# Altium PCB PCB_all_try.PcbDoc (part 1 of 5)
Units mm, origin at the board's own origin, x right, y up, seen from the top; angles counter-clockwise.
Board outline 345 x 240 mm, 2 copper layers (Top Layer, Bottom Layer); 484 components, 419 nets, 1569 pads, 699 vias.
Unrouted connection lines stored in the file: 63.
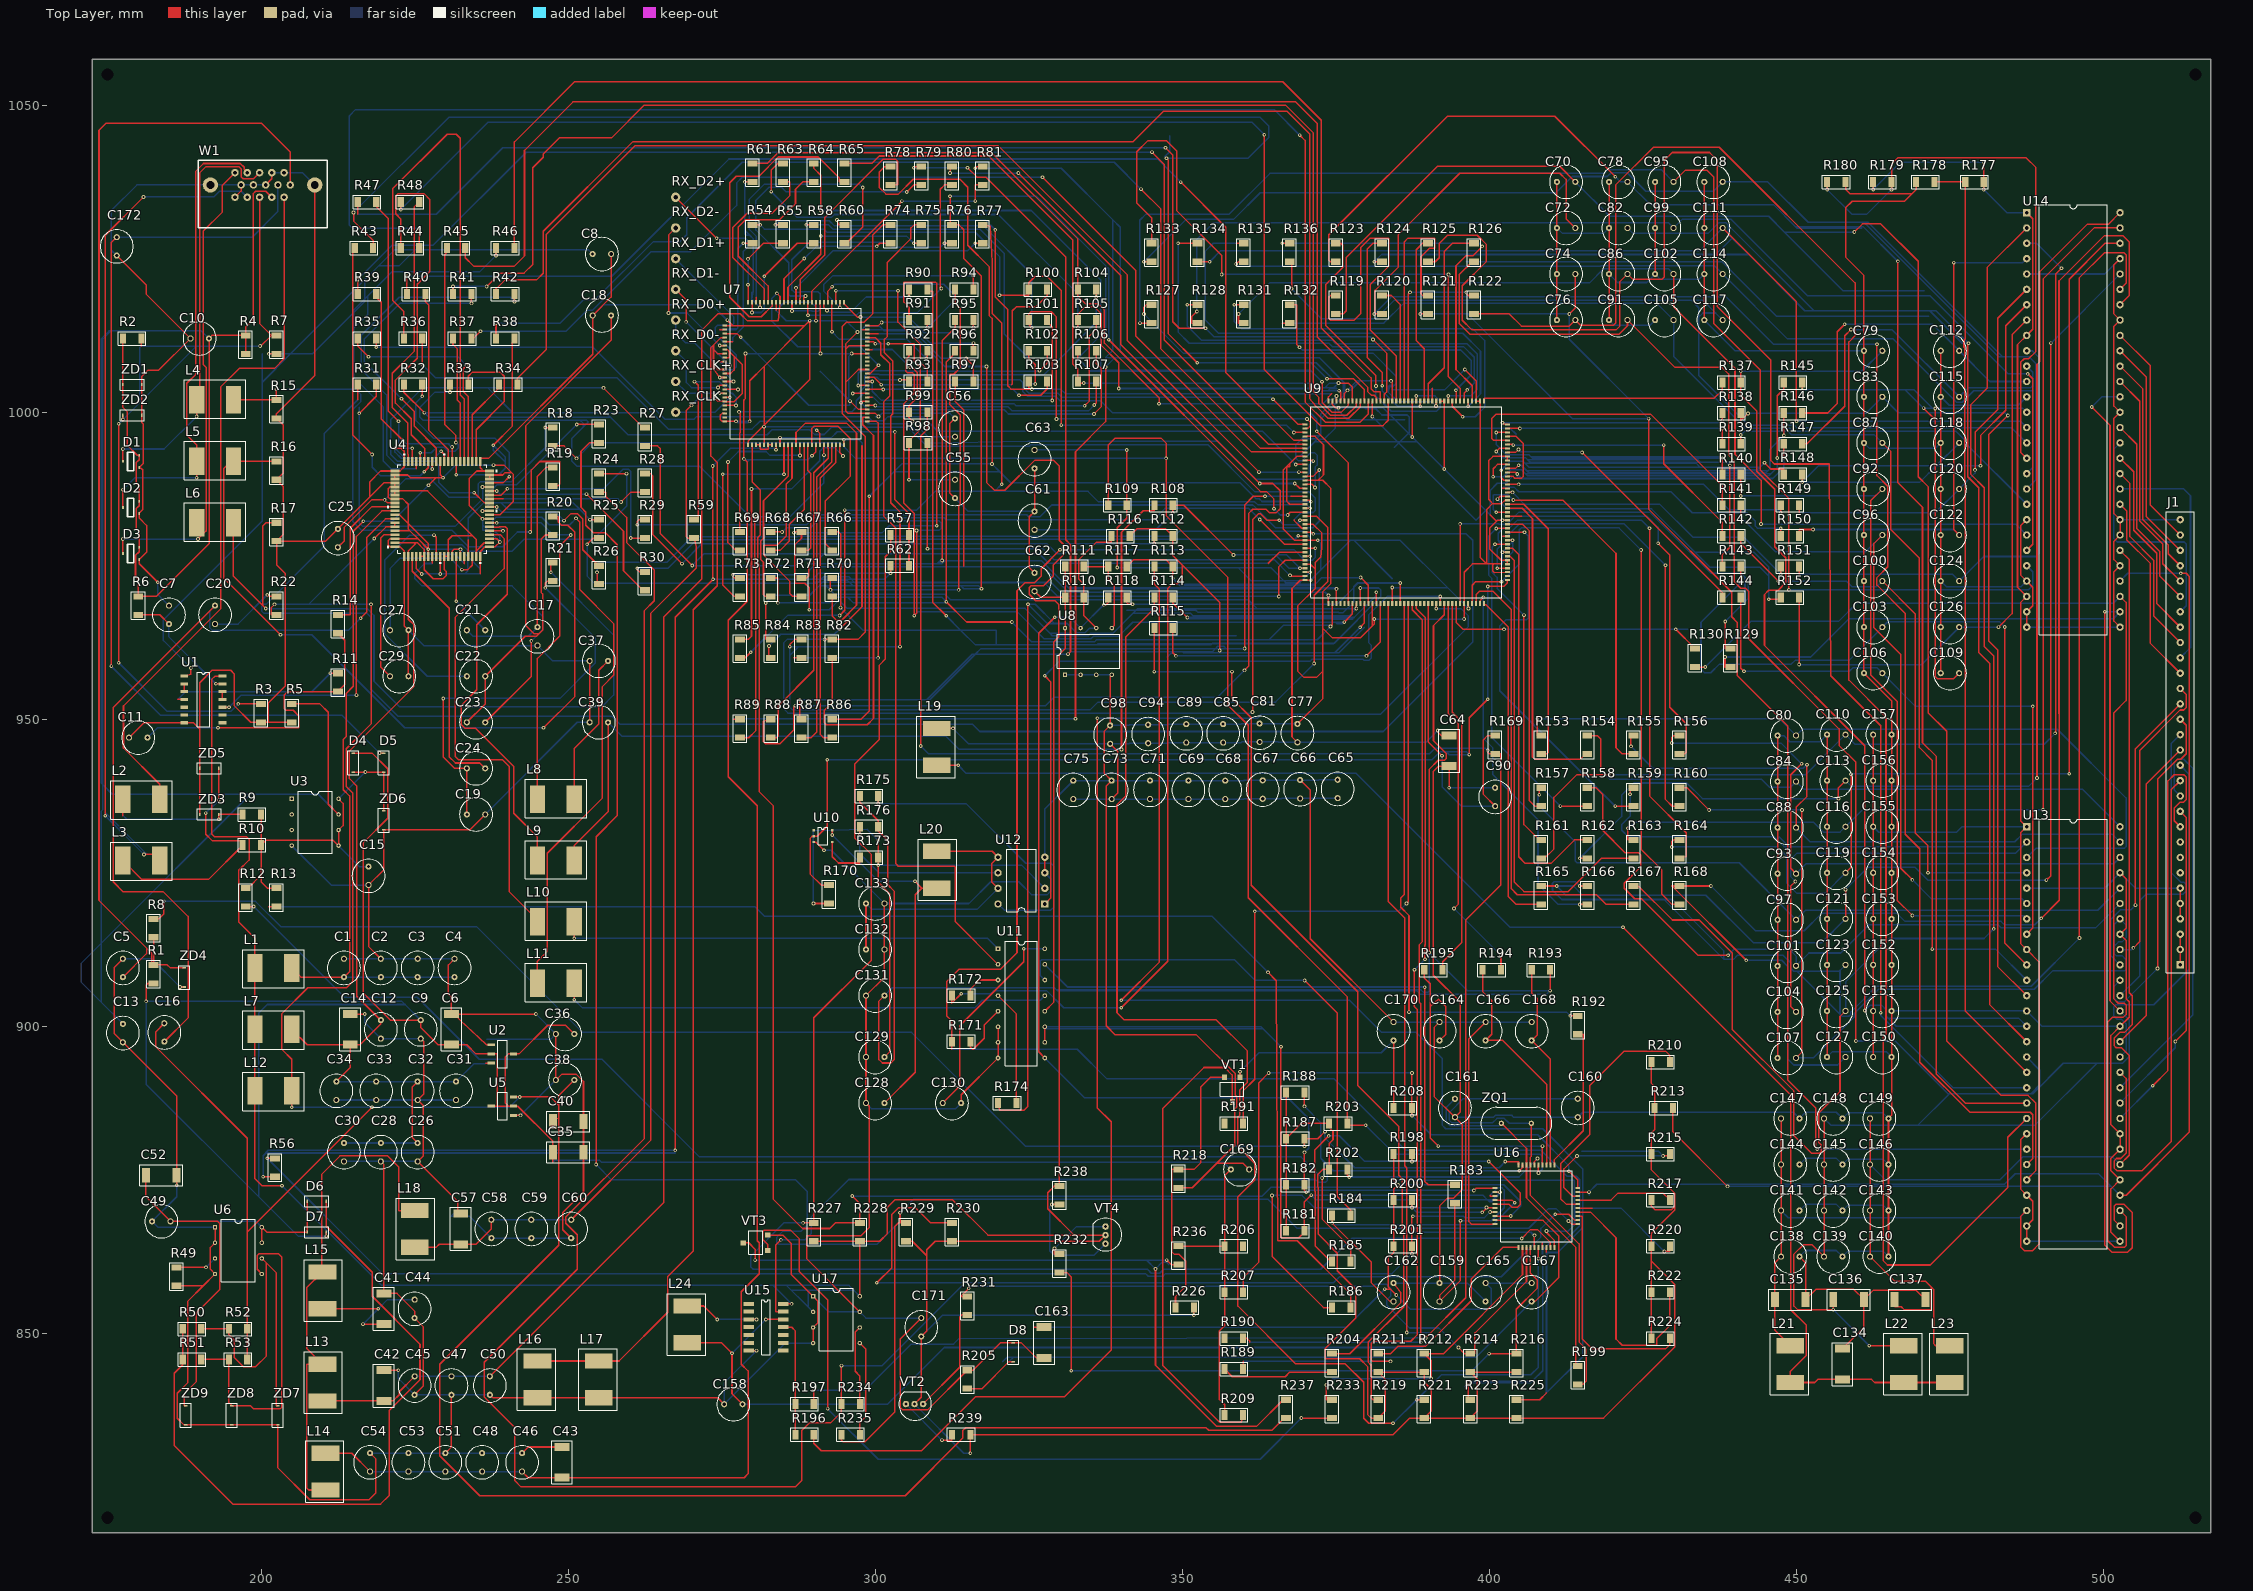
[diagram p0: Top Layer view]
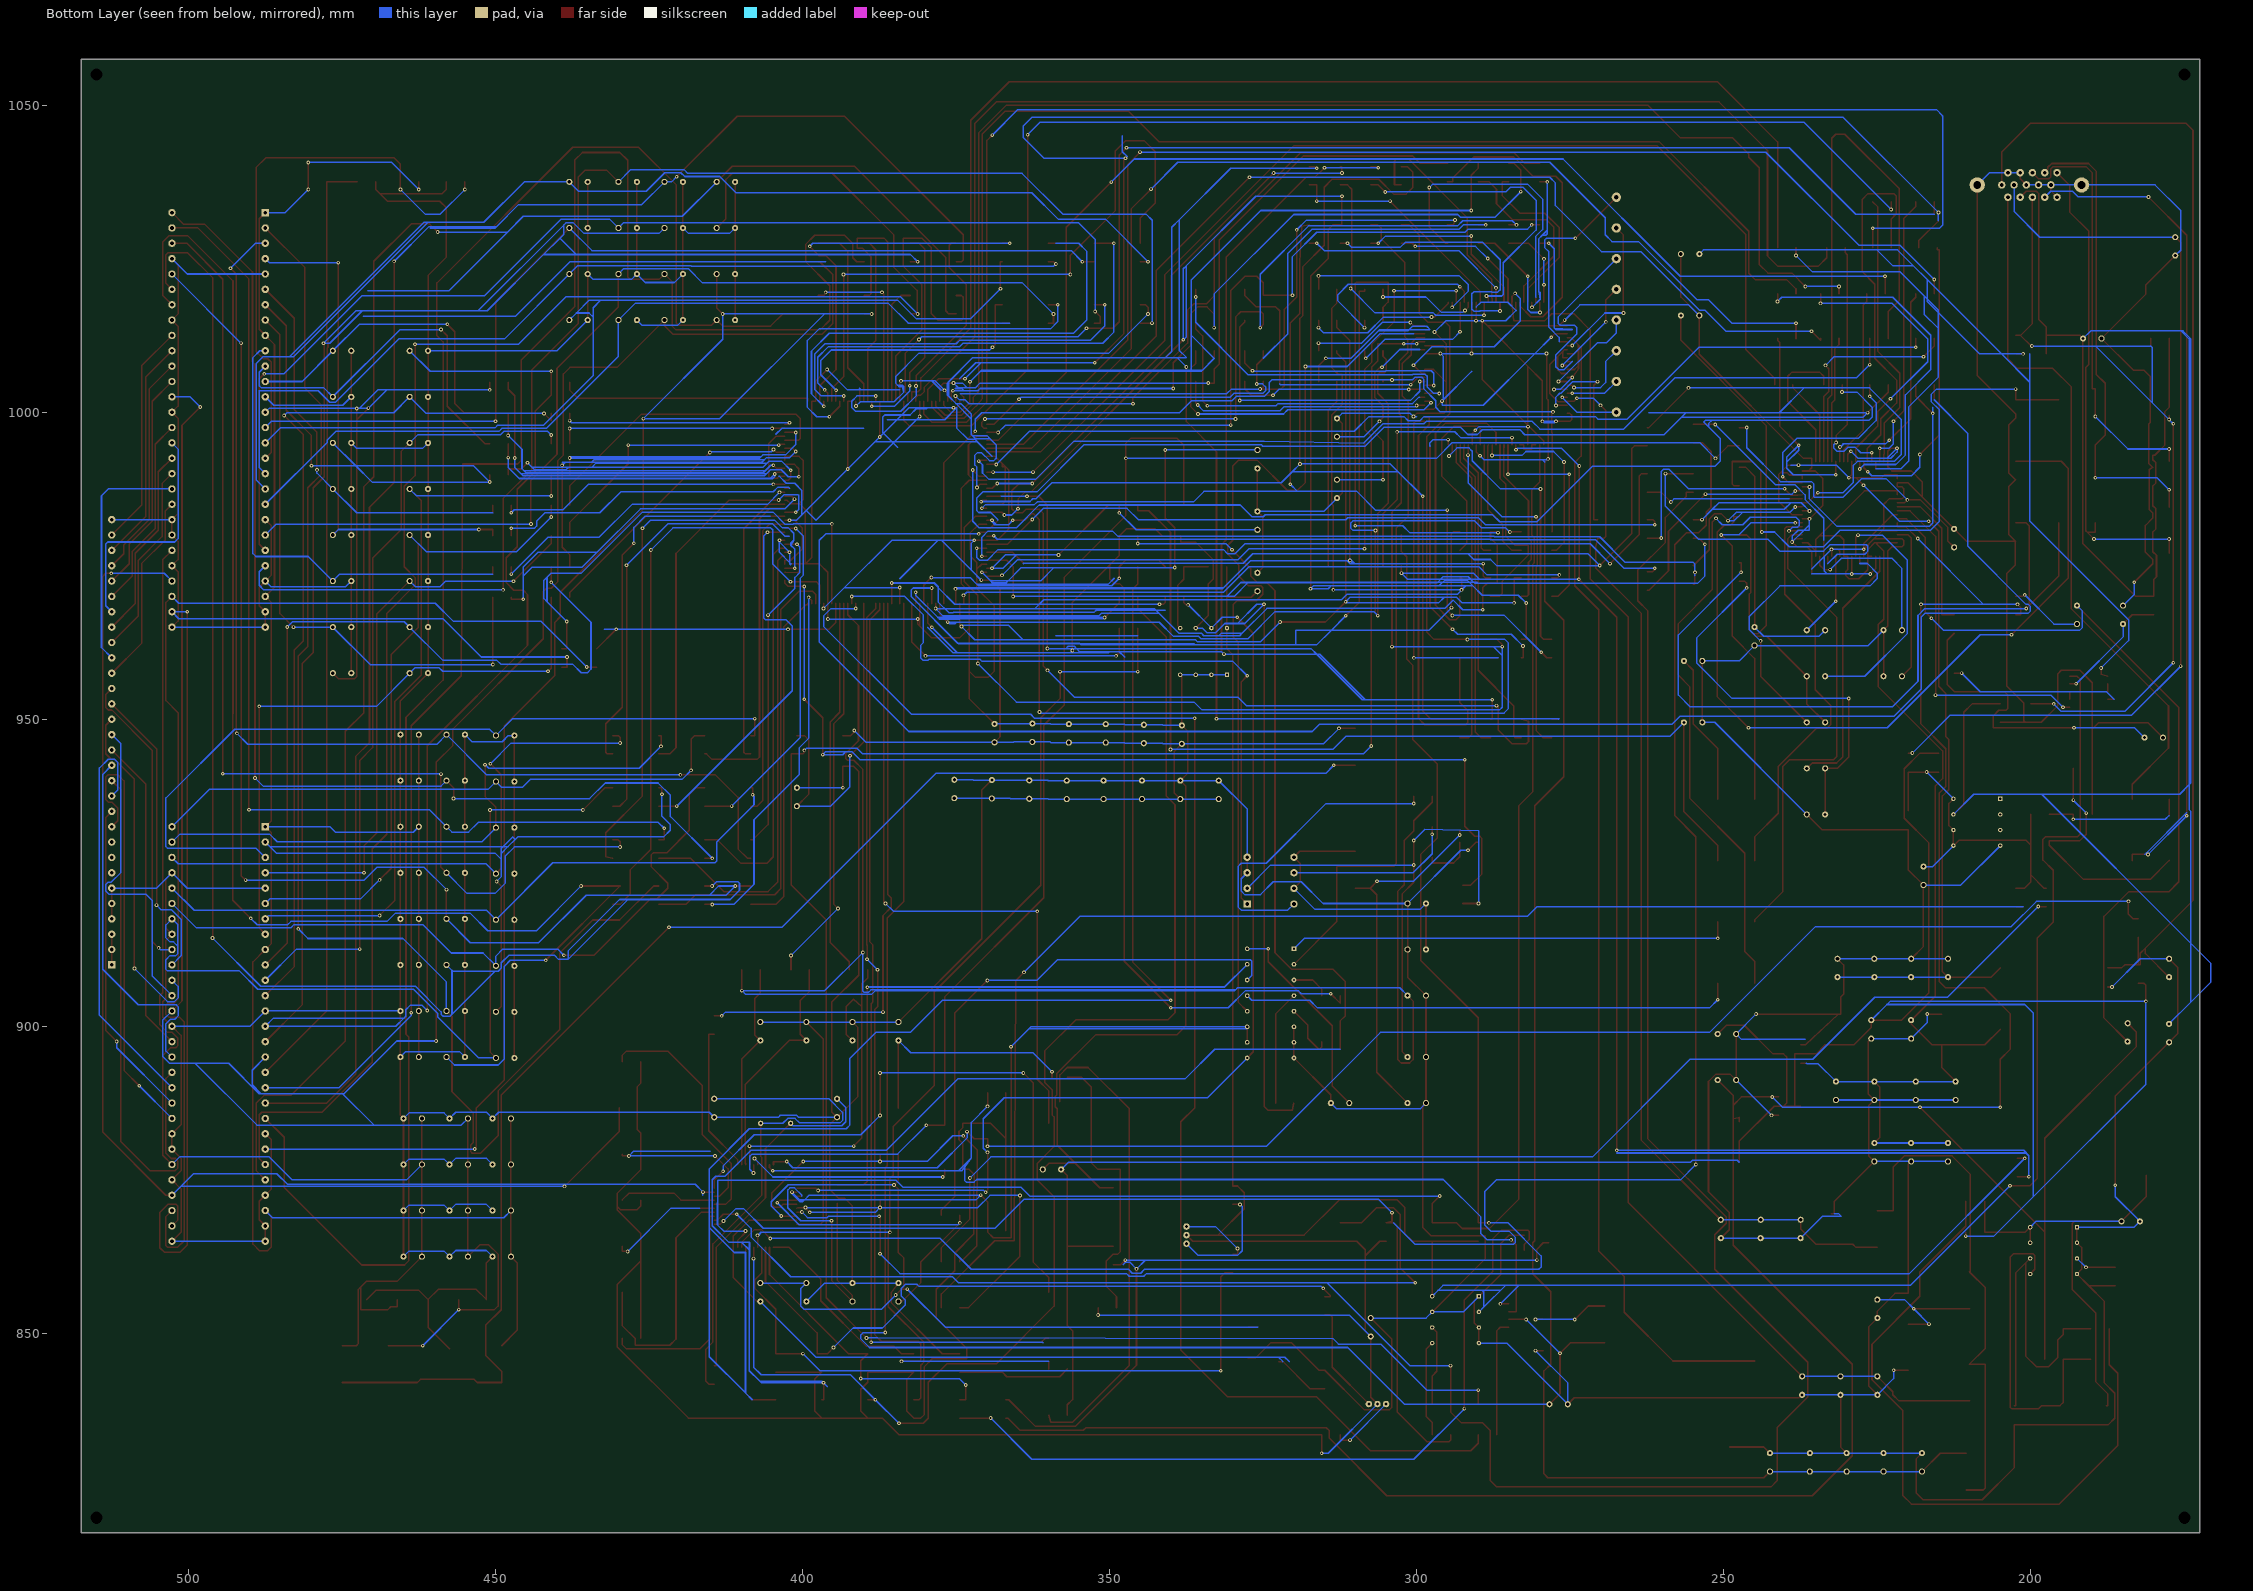
[diagram p1: Bottom Layer view, seen from below]

## Layer stack, top to bottom
Top Solder: solder mask 0.0102, Solder Resist, Dk 3.5
Top Layer: signal copper 0.0356
Dielectric 1: dielectric 0.32, FR-4, Dk 4.8
Bottom Layer: signal copper 0.0356
Bottom Solder: solder mask 0.0102, Solder Resist, Dk 3.5

## Board outline
172.5,817.5 517.5,817.5 517.5,1057.5 172.5,1057.5

## Design rules (kind name [scope] priority, off if disabled: settings)
Clearance [All] p1: gap=0.254 ignorepadtopadclearanceinfootprint=FALSE except(0: Arc-Hole Track-Hole SMDPad-Hole THPad-Hole Via-Hole Fill-Hole Poly-Hole Region-Hole Text-Hole; 0.2: Arc-SMDPad Track-SMDPad SMDPad-SMDPad)
PolygonConnect [All] p1: connectstyle=Relief reliefconductorwidth=0.254 reliefentries=4 polygonreliefangle="90 Angle" airgapwidth=0.254
RoutingVias [All] p1: holewidth=0.3 width=0.6 viastyle="Through Hole" minholewidth=0.3 minwidth=0.6 maxholewidth=0.3 maxwidth=0.6
SolderMaskExpansion [All] p1: expansion=0.102
Width [All] p1: maxlimit=0.25 minlimit=0.25 preferedwidth=0.25 minimp=50.000000 maximp=50.000000 favimp=50.000000
30 further rules are at their usual default settings.

## Classes and differential pairs
net class R_INB[0..7]: R_INB0 R_INB1 R_INB2 R_INB3 R_INB4 R_INB5 R_INB6 R_INB7
net class R_INA[0..7]: R_INA0 R_INA1 R_INA2 R_INA3 R_INA4 R_INA5 R_INA6 R_INA7
net class G_INB[0..7]: G_INB0 G_INB1 G_INB2 G_INB3 G_INB4 G_INB5 G_INB6 G_INB7
net class G_INA[0..7]: G_INA0 G_INA1 G_INA2 G_INA3 G_INA4 G_INA5 G_INA6 G_INA7
net class B_INB[0..7]: B_INB0 B_INB1 B_INB2 B_INB3 B_INB4 B_INB5 B_INB6 B_INB7
net class B_INA[0..7]: B_INA0 B_INA1 B_INA2 B_INA3 B_INA4 B_INA5 B_INA6 B_INA7
component class VGA: C172 W1
component class 36: C158 C159 C160 C161 C162 C163 C164 C165 C166 C167 C168 C169 C170 C171 D8 L24 R181 R182 R183 R184 R185 R186 R187 R188 R189 R190 R191 R192 R193 R194 R195 R196 R197 R198 R199 R200 R201 R202 R203 R204 R205 R206 R207 R208 R209 R210 R211 R212 R213 R214 R215 R216 R217 R218 R219 R220 R221 R222 R223 R224 R225 R226 R227 R228 R229 R230 R231 R232 R233 R234 R235 R236 R237 R238 R239 U15 U16 U17 VT1 VT2 VT3 VT4 ZQ1
component class 35: C134 C135 C136 C137 C138 C139 C140 C141 C142 C143 C144 C145 C146 C147 C148 C149 C150 C151 C152 C153 C154 C155 C156 C157 J1 L21 L22 L23 R177 R178 R179 R180 U13 U14
component class 34: C128 C129 C130 C131 C132 C133 L20 R170 R171 R172 R173 R174 R175 R176 U10 U11 U12
component class 33: C61 C62 C63 C64 C65 C66 C67 C68 C69 C70 C71 C72 C73 C74 C75 C76 C77 C78 C79 C80 C81 C82 C83 C84 C85 C86 C87 C88 C89 C90 C91 C92 C93 C94 C95 C96 C97 C98 C99 C100 C101 C102 C103 C104 C105 C106 C107 C108 C109 C110 C111 C112 C113 C114 C115 C116 C117 C118 C119 C120 C121 C122 C123 C124 C125 C126 C127 L19 R108 R109 R110 R111 R112 R113 R114 R115 R116 R117 R118 R119 R120 R121 R122 R123 R124 R125 R126 R127 R128 R129 R130 R131 R132 R133 R134 R135 R136 R137 R138 R139 R140 R141 R142 R143 R144 R145 R146 R147 R148 R149 R150 R151 R152 R153 R154 R155 R156 R157 R158 R159 R160 R161 R162 R163 R164 R165 R166 R167 R168 R169 U8 U9
component class 32: C41 C42 C43 C44 C45 C46 C47 C48 C49 C50 C51 C52 C53 C54 C55 C56 C57 C58 C59 C60 D6 D7 L13 L14 L15 L16 L17 L18 R49 R50 R51 R52 R53 R54 R55 R56 R57 R58 R59 R60 R61 R62 R63 R64 R65 R66 R67 R68 R69 R70 R71 R72 R73 R74 R75 R76 R77 R78 R79 R80 R81 R82 R83 R84 R85 R86 R87 R88 R89 R90 R91 R92 R93 R94 R95 R96 R97 R98 R99 R100 R101 R102 R103 R104 R105 R106 R107 RX_CLK RX_CLK+ RX_D0+ RX_D0- RX_D1+ RX_D1- RX_D2+ RX_D2- U6 U7 ZD7 ZD8 ZD9
component class 31: C1 C2 C3 C4 C5 C6 C7 C8 C9 C10 C11 C12 C13 C14 C15 C16 C17 C18 C19 C20 C21 C22 C23 C24 C25 C26 C27 C28 C29 C30 C31 C32 C33 C34 C35 C36 C37 C38 C39 C40 D1 D2 D3 D4 D5 L1 L2 L3 L4 L5 L6 L7 L8 L9 L10 L11 L12 R1 R2 R3 R4 R5 R6 R7 R8 R9 R10 R11 R12 R13 R14 R15 R16 R17 R18 R19 R20 R21 R22 R23 R24 R25 R26 R27 R28 R29 R30 R31 R32 R33 R34 R35 R36 R37 R38 R39 R40 R41 R42 R43 R44 R45 R46 R47 R48 U1 U2 U3 U4 U5 ZD1 ZD2 ZD3 ZD4 ZD5 ZD6

## Components (designator, comment, footprint, x,y, rotation, side; value= is the part's Value field where it differs from the comment)
C1 "*" cap_electro_13 213.5,909.5 r90 top
C2 "*" cap_electro_13 219.5,909.5 r90 top
C3 "*" cap_electro_13 225.5,909.5 r90 top
C4 "*" cap_electro_13 231.5,909.5 r90 top
C5 "*" cap_electro_13 177.5,909.5 r90 top
C6 "*" Cap_tantal_D 231,899.5 r270 top
C7 "*" cap_electro_13 185,967 r90 top
C8 "*" cap_electro_13 255.5,1025.75 r0 top
C9 "*" cap_electro_13 226,899.5 r270 top
C10 "*" cap_electro_13 190,1012 r180 top
C11 "*" cap_electro_13 180,947 r180 top
C12 "*" cap_electro_13 219.5,899.5 r270 top
C13 "*" cap_electro_13 177.5,898.9 r270 top
C14 "*" Cap_tantal_D 214.5,899.5 r270 top
C15 "*" cap_electro_13 217.5,924.5 r270 top
C16 "*" cap_electro_13 184.25,899 r90 top
C17 "*" cap_electro_13 245,963.5 r270 top
C18 "*" cap_electro_13 255.5,1015.75 r180 top
C19 "*" cap_electro_13 235,934.5 r0 top
C20 "*" cap_electro_13 192.5,967 r270 top
C21 "*" cap_electro_13 235,964.5 r180 top
C22 "*" cap_electro_13 235,957 r0 top
C23 "*" cap_electro_13 235,949.5 r180 top
C24 "*" cap_electro_13 235,942 r180 top
C25 "*" cap_electro_13 212.5,979.5 r270 top
C26 "*" cap_electro_13 225.5,879.5 r270 top
C27 "*" cap_electro_13 222.5,964.5 r180 top
C28 "*" cap_electro_13 219.5,879.5 r270 top
C29 "*" cap_electro_13 222.5,957 r180 top
C30 "*" cap_electro_13 213.5,879.5 r270 top
C31 "*" cap_electro_13 231.75,889.5 r270 top
C32 "*" cap_electro_13 225.5,889.5 r270 top
C33 "*" cap_electro_13 218.75,889.5 r270 top
C34 "*" cap_electro_13 212.25,889.5 r270 top
C35 "*" Cap_tantal_D 250,879.5 r180 top
C36 "*" cap_electro_13 249.5,898.75 r180 top
C37 "*" cap_electro_13 255,959.5 r180 top
C38 "*" cap_electro_13 249.5,891.25 r180 top
C39 "*" cap_electro_13 255,949.5 r180 top
C40 "*" Cap_tantal_D 250,884.5 r180 top
C41 "*" Cap_tantal_D 220,854 r270 top
C42 "*" Cap_tantal_D 220,841.5 r270 top
C43 "*" Cap_tantal_D 249,829 r270 top
C44 "*" cap_electro_13 225,854 r90 top
C45 "*" cap_electro_13 225,841.5 r90 top
C46 "*" cap_electro_13 242.5,829 r270 top
C47 "*" cap_electro_13 231,841.5 r90 top
C48 "*" cap_electro_13 236,829 r270 top
C49 "*" cap_electro_13 183.75,868.25 r0 top
C50 "*" cap_electro_13 237.25,841.5 r90 top
C51 "*" cap_electro_13 230,829 r270 top
C52 "*" Cap_tantal_D 183.75,875.75 r180 top
C53 "*" cap_electro_13 224,829 r270 top
C54 "*" cap_electro_13 217.75,829 r270 top
C55 "*" cap_electro_13 313,987.5 r90 top
C56 "*" cap_electro_13 313,997.5 r270 top
C57 "*" Cap_tantal_D 232.5,867 r270 top
C58 "*" cap_electro_13 237.5,867 r90 top
C59 "*" cap_electro_13 244,867 r90 top
C60 "*" cap_electro_13 250.5,867 r90 top
C61 "*" cap_electro_13 325.95,982.35 r270 top
C62 "*" cap_electro_13 325.95,972.35 r270 top
C63 "*" cap_electro_13 325.95,992.35 r90 top
C64 "*" Cap_tantal_D 393.45,944.85 r90 top
C65 "*" cap_electro_13 375.3,938.65 r270 top
C66 "*" cap_electro_13 369.2,938.6 r270 top
C67 "*" cap_electro_13 363.1,938.55 r270 top
C68 "*" cap_electro_13 357,938.5 r270 top
C69 "*" cap_electro_13 351,938.5 r270 top
C70 "*" cap_electro_13 412.5,1037.5 r0 top
C71 "*" cap_electro_13 344.75,938.5 r270 top
C72 "*" cap_electro_13 412.5,1030 r0 top
C73 "*" cap_electro_13 338.5,938.5 r270 top
C74 "*" cap_electro_13 412.5,1022.5 r0 top
C75 "*" cap_electro_13 332.25,938.5 r270 top
C76 "*" cap_electro_13 412.5,1015 r0 top
C77 "*" cap_electro_13 368.75,947.75 r270 top
C78 "*" cap_electro_13 421,1037.5 r0 top
C79 "*" cap_electro_13 462.5,1010 r0 top
C80 "*" cap_electro_13 448.45,947.35 r0 top
C81 "*" cap_electro_13 362.6,947.8 r270 top
C82 "*" cap_electro_13 421,1030 r0 top
C83 "*" cap_electro_13 462.5,1002.5 r0 top
C84 "*" cap_electro_13 448.45,939.85 r0 top
C85 "*" cap_electro_13 356.65,947.7 r270 top
C86 "*" cap_electro_13 421,1022.5 r0 top
C87 "*" cap_electro_13 462.5,995 r0 top
C88 "*" cap_electro_13 448.45,932.35 r0 top
C89 "*" cap_electro_13 350.65,947.7 r270 top
C90 "*" cap_electro_13 400.95,937.35 r270 top
C91 "*" cap_electro_13 421,1015 r0 top
C92 "*" cap_electro_13 462.5,987.5 r0 top
C93 "*" cap_electro_13 448.45,924.85 r0 top
C94 "*" cap_electro_13 344.45,947.6 r270 top
C95 "*" cap_electro_13 428.5,1037.5 r0 top
C96 "*" cap_electro_13 462.5,980 r0 top
C97 "*" cap_electro_13 448.45,917.35 r0 top
C98 "*" cap_electro_13 338.25,947.5 r270 top
C99 "*" cap_electro_13 428.5,1030 r0 top
C100 "*" cap_electro_13 462.5,972.5 r0 top
C101 "*" cap_electro_13 448.45,909.85 r0 top
C102 "*" cap_electro_13 428.5,1022.5 r0 top
C103 "*" cap_electro_13 462.5,965 r0 top
C104 "*" cap_electro_13 448.45,902.35 r0 top
C105 "*" cap_electro_13 428.5,1015 r0 top
C106 "*" cap_electro_13 462.5,957.5 r0 top
C107 "*" cap_electro_13 448.45,894.85 r0 top
C108 "*" cap_electro_13 436.5,1037.5 r0 top
C109 "*" cap_electro_13 475,957.5 r0 top
C110 "*" cap_electro_13 456.5,947.5 r0 top
C111 "*" cap_electro_13 436.5,1030 r0 top
C112 "*" cap_electro_13 475,1010 r0 top
C113 "*" cap_electro_13 456.5,940 r0 top
C114 "*" cap_electro_13 436.5,1022.5 r0 top
C115 "*" cap_electro_13 475,1002.5 r0 top
C116 "*" cap_electro_13 456.5,932.5 r0 top
C117 "*" cap_electro_13 436.5,1015 r0 top
C118 "*" cap_electro_13 475,995 r0 top
C119 "*" cap_electro_13 456.5,925 r0 top
C120 "*" cap_electro_13 475,987.5 r0 top
C121 "*" cap_electro_13 456.5,917.5 r0 top
C122 "*" cap_electro_13 475,980 r0 top
C123 "*" cap_electro_13 456.5,910 r0 top
C124 "*" cap_electro_13 475,972.5 r0 top
C125 "*" cap_electro_13 456.5,902.5 r0 top
C126 "*" cap_electro_13 475,965 r0 top
C127 "*" cap_electro_13 456.5,895 r0 top
C128 "*" cap_electro_13 300,887.5 r180 top
C129 "*" cap_electro_13 300,895 r180 top
C130 "*" cap_electro_13 312.5,887.5 r180 top
C131 "*" cap_electro_13 300,905 r180 top
C132 "*" cap_electro_13 300,912.5 r0 top
C133 "*" cap_electro_13 300,920 r0 top
C134 "*" Cap_tantal_D 457.5,845 r270 top
C135 "*" Cap_tantal_D 449,855.5 r180 top
C136 "*" Cap_tantal_D 458.5,855.5 r180 top
C137 "*" Cap_tantal_D 468.5,855.5 r180 top
C138 "*" cap_electro_13 449,862.5 r180 top
C139 "*" cap_electro_13 456,862.5 r180 top
C140 "*" cap_electro_13 463.5,862.5 r180 top
C141 "*" cap_electro_13 449,870 r180 top
C142 "*" cap_electro_13 456,870 r180 top
C143 "*" cap_electro_13 463.5,870 r180 top
C144 "*" cap_electro_13 449,877.5 r180 top
C145 "*" cap_electro_13 456,877.5 r180 top
C146 "*" cap_electro_13 463.5,877.5 r180 top
C147 "*" cap_electro_13 449,885 r180 top
C148 "*" cap_electro_13 456,885 r180 top
C149 "*" cap_electro_13 463.5,885 r180 top
C150 "*" cap_electro_13 464,895 r180 top
C151 "*" cap_electro_13 464,902.5 r180 top
C152 "*" cap_electro_13 464,910 r180 top
C153 "*" cap_electro_13 464,917.5 r180 top
C154 "*" cap_electro_13 464,925 r180 top
C155 "*" cap_electro_13 464,932.5 r180 top
C156 "*" cap_electro_13 464,940 r180 top
C157 "*" cap_electro_13 464,947.5 r180 top
C158 "*" cap_electro_13 276.9,838.46 r180 top
C159 "*" cap_electro_13 391.9,856.7 r270 top
C160 "*" cap_electro_13 414.4,886.7 r270 top
C161 "*" cap_electro_13 394.4,886.7 r270 top
C162 "*" cap_electro_13 384.4,856.7 r270 top
C163 "*" Cap_tantal_D 327.5,848.5 r90 top
C164 "*" cap_electro_13 391.9,899.2 r90 top
C165 "*" cap_electro_13 399.4,856.7 r90 top
C166 "*" cap_electro_13 399.4,899.2 r90 top
C167 "*" cap_electro_13 406.9,856.7 r90 top
C168 "*" cap_electro_13 406.9,899.2 r90 top
C169 "*" cap_electro_13 359.4,876.7 r0 top
C170 "*" cap_electro_13 384.4,899.2 r90 top
C171 "*" cap_electro_13 307.5,851 r90 top
C172 "*" cap_electro_13 176.5,1027 r90 top
D1 "BAV99" BAV99 178.75,992 r180 top
D2 "BAV99" BAV99 178.75,984.5 r180 top
D3 "BAV99" BAV99 178.75,977 r180 top
D4 "*" zener_diode 215,942.9 r270 top
D5 "*" zener_diode 220,942.9 r270 top
D6 "*" zener_diode 209,871.5 r180 top
D7 "*" zener_diode 209,866.5 r180 top
D8 "*" zener_diode 322.5,846.9 r270 top
J1 "FI-SE30P-HF" FI-SE30P-HF_v2 512.5,910 r180 top
L1 "*" inductor 202,909.5 r180 top
L2 "*" inductor 180.5,937 r180 top
L3 "*" inductor 180.5,927 r180 top
L4 "*" inductor 192.5,1002 r0 top
L5 "*" inductor 192.5,992 r0 top
L6 "*" inductor 192.5,982 r0 top
L7 "*" inductor 202,899.5 r180 top
L8 "*" inductor 248,937 r0 top
L9 "*" inductor 248,927 r0 top
L10 "*" inductor 248,917 r0 top
L11 "*" inductor 248,907 r0 top
L12 "*" inductor 202,889.5 r180 top
L13 "*" inductor 210,842 r270 top
L14 "*" inductor 210.5,827.5 r90 top
L15 "*" inductor 210,857 r270 top
L16 "*" inductor 245,842.5 r90 top
L17 "*" inductor 255,842.5 r90 top
L18 "*" inductor 225,867 r270 top
L19 "*" inductor 310,945.5 r90 top
L20 "*" inductor 310,925.5 r270 top
L21 "*" inductor 449,845 r90 top
L22 "*" inductor 467.5,845 r90 top
L23 "*" inductor 475,845 r90 top
L24 "*" inductor 269.4,851.46 r90 top
R1 "*" R_1206 182.5,908.5 r270 top
R2 "*" R_1206 179,1012 r180 top
R3 "*" R_1206 200,951 r90 top
R4 "*" R_1206 197.5,1011 r90 top
R5 "*" R_1206 205,951 r90 top
R6 "*" R_1206 180,968.5 r270 top
R7 "*" R_1206 202.5,1011 r270 top
R8 "*" R_1206 182.5,916 r90 top
R9 "*" R_1206 198.5,934.5 r0 top
R10 "*" R_1206 198.5,929.5 r0 top
R11 "*" R_1206 212.5,956 r270 top
R12 "*" R_1206 197.5,921 r90 top
R13 "*" R_1206 202.5,921 r90 top
R14 "*" R_1206 212.5,965.5 r90 top
R15 "*" R_1206 202.5,1000.5 r90 top
R16 "*" R_1206 202.5,990.5 r90 top
R17 "*" R_1206 202.5,980.5 r90 top
R18 "*" R_1206 247.5,996 r90 top
R19 "*" R_1206 247.5,989.5 r90 top
R20 "*" R_1206 247.5,981.5 r270 top
R21 "*" R_1206 247.5,974 r270 top
R22 "*" R_1206 202.5,968.5 r90 top
R23 "*" R_1206 255,996.5 r90 top
R24 "*" R_1206 255,988.5 r90 top
R25 "*" R_1206 255,981 r270 top
R26 "*" R_1206 255,973.5 r270 top
R27 "*" R_1206 262.5,996 r270 top
R28 "*" R_1206 262.5,988.5 r90 top
R29 "*" R_1206 262.5,981 r90 top
R30 "*" R_1206 262.5,972.5 r90 top
R31 "*" R_1206 217.25,1004.5 r180 top
R32 "*" R_1206 224.75,1004.5 r180 top
R33 "*" R_1206 232.25,1004.5 r180 top
R34 "*" R_1206 240.25,1004.5 r0 top
R35 "*" R_1206 217.25,1012 r0 top
R36 "*" R_1206 224.75,1012 r0 top
R37 "*" R_1206 232.75,1012 r0 top
R38 "*" R_1206 239.75,1012 r180 top
R39 "*" R_1206 217.25,1019.25 r180 top
R40 "*" R_1206 225.25,1019.25 r180 top
R41 "*" R_1206 232.75,1019.25 r180 top
R42 "*" R_1206 239.75,1019.25 r180 top
R43 "*" R_1206 216.75,1026.75 r0 top
R44 "*" R_1206 224.25,1026.75 r0 top
R45 "*" R_1206 231.75,1026.75 r0 top
R46 "*" R_1206 239.75,1026.75 r0 top
R47 "*" R_1206 217.25,1034.25 r180 top
R48 "*" R_1206 224.25,1034.25 r180 top
R49 "*" R_1206 186.25,859.25 r90 top
R50 "*" R_1206 188.75,850.75 r180 top
R51 "*" R_1206 188.75,845.75 r180 top
R52 "*" R_1206 196.25,850.75 r180 top
R53 "*" R_1206 196.25,845.75 r180 top
R54 "*" R_1206 280,1029 r90 top
R55 "*" R_1206 285,1029 r90 top
R56 "*" R_1206 202.25,877 r90 top
R57 "*" R_1206 304,980 r180 top
R58 "*" R_1206 290,1029 r90 top
R59 "*" R_1206 270.5,981 r90 top
R60 "*" R_1206 295,1029 r90 top
R61 "*" R_1206 280,1039 r90 top
R62 "*" R_1206 304,975 r180 top
R63 "*" R_1206 285,1039 r90 top
R64 "*" R_1206 290,1039 r90 top
R65 "*" R_1206 295,1039 r90 top
R66 "*" R_1206 293,979 r90 top
R67 "*" R_1206 288,979 r90 top
R68 "*" R_1206 283,979 r90 top
R69 "*" R_1206 278,979 r90 top
R70 "*" R_1206 293,971.5 r90 top
R71 "*" R_1206 288,971.5 r90 top
R72 "*" R_1206 283,971.5 r90 top
R73 "*" R_1206 278,971.5 r90 top
R74 "*" R_1206 302.5,1029 r90 top
R75 "*" R_1206 307.5,1029 r90 top
R76 "*" R_1206 312.5,1029 r90 top
R77 "*" R_1206 317.5,1029 r90 top
R78 "*" R_1206 302.5,1038.5 r90 top
R79 "*" R_1206 307.5,1038.5 r90 top
R80 "*" R_1206 312.5,1038.5 r90 top
R81 "*" R_1206 317.5,1038.5 r90 top
R82 "*" R_1206 293,961.5 r90 top
R83 "*" R_1206 288,961.5 r90 top
R84 "*" R_1206 283,961.5 r90 top
R85 "*" R_1206 278,961.5 r270 top
R86 "*" R_1206 293,948.5 r90 top
R87 "*" R_1206 288,948.5 r90 top
R88 "*" R_1206 283,948.5 r90 top
R89 "*" R_1206 278,948.5 r90 top
R90 "*" R_1206 307,1020 r0 top
R91 "*" R_1206 307,1015 r180 top
R92 "*" R_1206 307,1010 r180 top
R93 "*" R_1206 307,1005 r180 top
R94 "*" R_1206 314.5,1020 r180 top
R95 "*" R_1206 314.5,1015 r180 top
R96 "*" R_1206 314.5,1010 r180 top
R97 "*" R_1206 314.5,1005 r180 top
R98 "*" R_1206 307,995 r0 top
R99 "*" R_1206 307,1000 r0 top
R100 "*" R_1206 326.5,1020 r180 top
R101 "*" R_1206 326.5,1015 r180 top
R102 "*" R_1206 326.5,1010 r180 top
R103 "*" R_1206 326.5,1005 r180 top
R104 "*" R_1206 334.5,1020 r180 top
R105 "*" R_1206 334.5,1015 r180 top
R106 "*" R_1206 334.5,1010 r180 top
R107 "*" R_1206 334.5,1005 r180 top
R108 "*" R_1206 346.95,984.85 r180 top
R109 "*" R_1206 339.45,984.85 r180 top
R110 "*" R_1206 332.45,969.85 r0 top
R111 "*" R_1206 332.45,974.85 r0 top
R112 "*" R_1206 346.95,979.85 r180 top
R113 "*" R_1206 346.95,974.85 r180 top
R114 "*" R_1206 346.95,969.85 r180 top
R115 "*" R_1206 346.95,964.85 r180 top
R116 "*" R_1206 339.95,979.85 r180 top
R117 "*" R_1206 339.45,974.85 r180 top
R118 "*" R_1206 339.45,969.85 r180 top
R119 "*" R_1206 375,1017.5 r90 top
R120 "*" R_1206 382.5,1017.5 r90 top
R121 "*" R_1206 390,1017.5 r90 top
R122 "*" R_1206 397.5,1017.5 r90 top
R123 "*" R_1206 375,1026 r90 top
R124 "*" R_1206 382.5,1026 r90 top
R125 "*" R_1206 390,1026 r90 top
R126 "*" R_1206 397.5,1026 r90 top
R127 "*" R_1206 345,1016 r90 top
R128 "*" R_1206 352.5,1016 r90 top
R129 "*" R_1206 439.25,960 r90 top
R130 "*" R_1206 433.5,960 r90 top
R131 "*" R_1206 360,1016 r90 top
R132 "*" R_1206 367.5,1016 r90 top
R133 "*" R_1206 345,1026 r90 top
R134 "*" R_1206 352.5,1026 r90 top
R135 "*" R_1206 360,1026 r90 top
R136 "*" R_1206 367.5,1026 r90 top
R137 "*" R_1206 439.45,1004.85 r180 top
R138 "*" R_1206 439.45,999.85 r180 top
R139 "*" R_1206 439.45,994.85 r180 top
R140 "*" R_1206 439.45,989.85 r180 top
R141 "*" R_1206 439.45,984.85 r180 top
R142 "*" R_1206 439.45,979.85 r180 top
R143 "*" R_1206 439.45,974.85 r180 top
R144 "*" R_1206 439.45,969.85 r180 top
R145 "*" R_1206 449.45,1004.85 r180 top
R146 "*" R_1206 449.45,999.85 r180 top
R147 "*" R_1206 449.45,994.85 r180 top
R148 "*" R_1206 449.45,989.85 r180 top
R149 "*" R_1206 448.95,984.85 r180 top
R150 "*" R_1206 448.95,979.85 r180 top
R151 "*" R_1206 448.95,974.85 r180 top
R152 "*" R_1206 448.95,969.85 r180 top
R153 "*" R_1206 408.45,945.85 r270 top
R154 "*" R_1206 415.95,945.85 r270 top
R155 "*" R_1206 423.45,945.85 r270 top
R156 "*" R_1206 430.95,945.85 r270 top
R157 "*" R_1206 408.45,937.35 r270 top
R158 "*" R_1206 415.95,937.35 r270 top
R159 "*" R_1206 423.45,937.35 r270 top
R160 "*" R_1206 430.95,937.35 r270 top
R161 "*" R_1206 408.45,928.85 r90 top
R162 "*" R_1206 415.95,928.85 r90 top
R163 "*" R_1206 423.45,928.85 r270 top
R164 "*" R_1206 430.95,928.85 r270 top
R165 "*" R_1206 408.45,921.35 r270 top
R166 "*" R_1206 415.95,921.35 r270 top
R167 "*" R_1206 423.45,921.35 r270 top
R168 "*" R_1206 430.95,921.35 r270 top
R169 "*" R_1206 400.95,945.85 r90 top
R170 "*" R_1206 292.5,921.5 r270 top
R171 "*" R_1206 314,897.5 r0 top
R172 "*" R_1206 314,905 r0 top
R173 "*" R_1206 299,927.5 r0 top
R174 "*" R_1206 321.5,887.5 r180 top
R175 "*" R_1206 299,937.5 r180 top
R176 "*" R_1206 299,932.5 r0 top
R177 "*" R_1206 479,1037.5 r0 top
R178 "*" R_1206 471,1037.5 r0 top
R179 "*" R_1206 464,1037.5 r180 top
R180 "*" R_1206 456.5,1037.5 r180 top
R181 "*" R_1206 368.4,866.7 r180 top
R182 "*" R_1206 368.4,874.2 r180 top
R183 "*" R_1206 394.4,872.7 r270 top
R184 "*" R_1206 375.9,869.2 r180 top
R185 "*" R_1206 375.9,861.7 r180 top
R186 "*" R_1206 375.9,854.2 r180 top
R187 "*" R_1206 368.4,881.7 r180 top
R188 "*" R_1206 368.4,889.2 r180 top
R189 "*" R_1206 358.4,844.2 r0 top
R190 "*" R_1206 358.4,849.2 r0 top
R191 "*" R_1206 358.4,884.2 r0 top
R192 "*" R_1206 414.4,900.2 r90 top
R193 "*" R_1206 408.4,909.2 r0 top
R194 "*" R_1206 400.4,909.2 r0 top
R195 "*" R_1206 390.9,909.2 r0 top
R196 "*" R_1206 288.5,833.5 r0 top
R197 "*" R_1206 288.5,838.5 r0 top
R198 "*" R_1206 385.9,879.2 r0 top
R199 "*" R_1206 414.4,843.2 r270 top
R200 "*" R_1206 385.9,871.7 r0 top
R201 "*" R_1206 385.9,864.2 r0 top
R202 "*" R_1206 375.4,876.7 r180 top
R203 "*" R_1206 375.4,884.2 r180 top
R204 "*" R_1206 374.4,845.2 r270 top
R205 "*" R_1206 315,842.5 r270 top
R206 "*" R_1206 358.4,864.2 r0 top
R207 "*" R_1206 358.4,856.7 r0 top
R208 "*" R_1206 385.9,886.7 r180 top
R209 "*" R_1206 358.4,836.7 r0 top
R210 "*" R_1206 427.9,894.2 r0 top
R211 "*" R_1206 381.9,845.2 r90 top
R212 "*" R_1206 389.4,845.2 r90 top
R213 "*" R_1206 428.4,886.7 r0 top
R214 "*" R_1206 396.9,845.2 r90 top
R215 "*" R_1206 427.9,879.2 r0 top
R216 "*" R_1206 404.4,845.2 r90 top
R217 "*" R_1206 427.9,871.7 r0 top
R218 "*" R_1206 349.4,875.2 r90 top
R219 "*" R_1206 381.9,837.7 r90 top
R220 "*" R_1206 427.9,864.2 r0 top
R221 "*" R_1206 389.4,837.7 r90 top
R222 "*" R_1206 427.9,856.7 r0 top
R223 "*" R_1206 396.9,837.7 r90 top
R224 "*" R_1206 427.9,849.2 r0 top
R225 "*" R_1206 404.4,837.7 r90 top
R226 "*" R_1206 350.4,854.2 r0 top
R227 "*" R_1206 290,866.5 r90 top
R228 "*" R_1206 297.5,866.5 r90 top
R229 "*" R_1206 305,866.5 r90 top
R230 "*" R_1206 312.5,866.5 r90 top
R231 "*" R_1206 315,854.5 r270 top
R232 "*" R_1206 330,861.4 r90 top
R233 "*" R_1206 374.4,837.7 r270 top
R234 "*" R_1206 296,838.5 r0 top
R235 "*" R_1206 296,833.5 r0 top
R236 "*" R_1206 349.4,862.7 r90 top
R237 "*" R_1206 366.9,837.7 r270 top
R238 "*" R_1206 330,872.5 r90 top
R239 "*" R_1206 314,833.5 r0 top
RX_CLK "*" ARROW 267.5,1000 r180 top
RX_CLK+ "*" ARROW 267.5,1005 r180 top
RX_D0+ "*" ARROW 267.5,1015 r180 top
RX_D0- "*" ARROW 267.5,1010 r180 top
RX_D1+ "*" ARROW 267.5,1025 r180 top
RX_D1- "*" ARROW 267.5,1020 r180 top
RX_D2+ "*" ARROW 267.5,1035 r180 top
RX_D2- "*" ARROW 267.5,1030 r180 top
U1 "*" 74LVX14(SO-14) 187.585,957.04 r0 top
U2 "AIC1732" AIC1732(SOT-89) 239.425,895.5 r0 top
U3 "24C21" 24Cxx 205,937.04 r0 top
U4 "AD9883ABSTZ-140" ST_80_2_ADI 229.5,984.25 r270 top
U5 "AIC1732" AIC1732(SOT-89) 239.175,887 r180 top
U6 "24C02" 24Cxx 192.5,867.29 r0 top
U7 "*" SIL151 279.3,994.7 r270 top
U8 "24LC08" 24Cxx 330.91,957.23 r90 top
U9 "SD1210" SD1210 373.8,968.85 r90 top
U10 "F14-SINGLE" 74AHC1G14(SOT25) 290,931.9 r0 top
U11 "74LV4053" 74LV4053(SOT38-4) 320,912.62 r0 top
U12 "AV9173-01" AV9173-01(DIP8) 327.62,919.92 r180 top
U13 "SN75LVDS83" SN75LVDS83_v2 487.5,932.5 r0 top
U14 "SN75LVDS83" SN75LVDS83_v2 487.5,1032.5 r0 top
U15 "74LCX125" 74LCX125(page12) 279.4,854.81 r0 top
U16 "SM0230" SM0230 410.6,877.45 r90 top
U17 "24LC16" 24Cxx 289.88,856.04 r0 top
VT1 "MMBT3904L" MMBT3904L 359.4,890.7 r270 top
VT2 "2N3906" 2N3906 306.4,838.5 r270 top
VT3 "MMBT3904L" MMBT3904L 281.5,863.5 r180 top
VT4 "2N3906" 2N3906 337.5,866 r0 top
W1 "DB-15" VGA 200.75,1037 r0 top
ZD1 "*" zener_diode 179,1004.5 r180 top
ZD2 "*" zener_diode 179,999.5 r180 top
ZD3 "*" zener_diode 191.6,934.5 r0 top
ZD4 "*" zener_diode 187.5,908 r90 top
ZD5 "*" zener_diode 191.6,942 r0 top
ZD6 "*" zener_diode 220,933.6 r90 top
ZD7 "*" zener_diode 202.75,836.75 r90 top
ZD8 "*" zener_diode 195.25,836.75 r90 top
ZD9 "*" zener_diode 187.75,836.75 r90 top
ZQ1 "*" crystal 404.4,884.2 r0 top

## Footprints (in the part's own frame and the unit in brackets; to place one, negate y for a bottom-side part, rotate by r counter-clockwise, add the part's x,y. Pads: shape width x height; smd on the part's side, far side on the other; paste and mask are expansions set on the pad)
2N3906 [mm]
  round 1.06 hole 0.53: 1(0,1.4) 2(0,0) 3(0,-1.4)
  silkscreen extent -2,-2.57 2.66,2.75
24Cxx [mm]
  rect 0.72x0.72 hole 0.36: 1(0,0)
  round 0.72 hole 0.36: 2(0,-2.54) 3(0,-5.08) 4(0,-7.62) 5(7.62,-7.62) 6(7.62,-5.08) 7(7.62,-2.54) 8(7.62,0)
  silkscreen extent 1.03,-8.89 6.58,1.27
74AHC1G14(SOT25) [mm]
  rect 0.4x0.38 smd: 1(0,0) 2(0,-0.95) 3(0,-1.9) 4(3,-1.9) 5(3,0)
  silkscreen extent 0.75,-2.38 2.25,0.48
74LCX125(page12) [mm]
  rect 1.7x0.65 smd: 1(0,0) 2(0,-1.27) 3(0,-2.54) 4(0,-3.81) 5(0,-5.08) 6(0,-6.35) 7(0,-7.62) 8(5.6,-7.62) 9(5.6,-6.35) 10(5.6,-5.08) 11(5.6,-3.81) 12(5.6,-2.54) 13(5.6,-1.27) 14(5.6,0)
  silkscreen extent 2.08,-8.26 3.52,0.64
74LV4053(SOT38-4) [mm]
  rect 0.76x0.76 hole 0.38: 1(0,0)
  round 0.76 hole 0.38: 2(0,-2.54) 3(0,-5.08) 4(0,-7.62) 5(0,-10.16) 6(0,-12.7) 7(0,-15.24) 8(0,-17.78) 9(7.62,-17.78) 10(7.62,-15.24) 11(7.62,-12.7) 12(7.62,-10.16) 13(7.62,-7.62) 14(7.62,-5.08) 15(7.62,-2.54) 16(7.62,0)
  silkscreen extent 1.22,-19.05 6.4,1.27
74LVX14(SO-14) [mm]
  rect 1.27x0.51 smd: 1(-0.085,0) 2(-0.085,-1.27) 3(-0.085,-2.54) 4(-0.085,-3.81) 5(-0.085,-5.08) 6(-0.085,-6.35) 7(-0.085,-7.62) 8(6.115,-7.62) 9(6.115,-6.35) 10(6.115,-5.08) 11(6.115,-3.81) 12(6.115,-2.54) 13(6.115,-1.27) 14(6.115,0)
  silkscreen extent 2,-8.26 4.03,0.64
AIC1732(SOT-89) [mm]
  rect 1.2x0.48 smd: 1(-1.925,1.5) 2(-1.925,0) 3(-1.925,-1.5) 4(1.675,0)
  silkscreen extent -0.91,-2.25 0.66,2.25
ARROW [mil]
  round 60 hole 30: 1(0,0)
AV9173-01(DIP8) [mm]
  rect 1.2x1.2 hole 0.6: 1(0,0)
  round 1.2 hole 0.6: 2(0,-2.54) 3(0,-5.08) 4(0,-7.62) 5(7.62,-7.62) 6(7.62,-5.08) 7(7.62,-2.54) 8(7.62,0)
  silkscreen extent 1.43,-8.89 6.18,1.27
BAV99 [mm]
  rect 0.3x0.45 smd: 1(-1.4,1) 2(-1.4,-1) 3(1.25,0)
  silkscreen extent -0.5,-1.5 0.5,1.5
cap_electro_13 [mm]
  round 1 hole 0.5: 1(-1.5,0)
  round 1 hole 0.6: 2(1.5,0)
  silkscreen extent -2.7,-2.7 2.7,2.7
Cap_tantal_D [mm]
  rect 1.3x2.4 smd: 1(2.5,0) 2(-2.5,0)
  silkscreen extent -3.5,-1.7 3.5,1.7
crystal [mm]
  round 0.86 hole 0.43: 1(-2.44,0) 2(2.44,0)
  silkscreen extent -5.8,-2.6 5.8,2.6
FI-SE30P-HF_v2 [mm]
  rect 1.2x1.2 hole 0.6: 1(0,0)
  round 1.2 hole 0.6: 2(0,-2.5) 3(0,-5) 4(0,-7.5) 5(0,-10) 6(0,-12.5) 7(0,-15) 8(0,-17.5) 9(0,-20) 10(0,-22.5) 11(0,-25) 12(0,-27.5) 13(0,-30) 14(0,-32.5) 15(0,-35) 16(0,-37.5) 17(0,-40) 18(0,-42.5) 19(0,-45) 20(0,-47.5) 21(0,-50) 22(0,-52.5) 23(0,-55) 24(0,-57.5) 25(0,-60) 26(0,-62.5) 27(0,-65) 28(0,-67.5) 29(0,-70) 30(0,-72.5)
  silkscreen extent -2.25,-73.75 2.25,1.25
inductor [mm]
  rect 2.5x4.5 smd: 1(-3,0) 2(3,0)
  silkscreen extent -5,-3 5,3.25
MMBT3904L [mm]
  rect 0.95x0.8 smd: 1(-1,0) 2(-1,-2.5) 3(3,-1.25)
  silkscreen extent -0.18,-3.25 2.09,0.65
R_1206 [mm]
  rect 1x1.6 smd: 1(-1.5,0) 2(1.5,0)
  silkscreen extent -2.25,-1.1 2.25,1.1
SD1210 [mm]
  rect 0.8x0.35 smd: 1(0,0) 2(0,-0.65) 3(0,-1.3) 4(0,-1.95) 5(0,-2.6) 6(0,-3.25) 7(0,-3.9) 8(0,-4.55) 9(0,-5.2) 10(0,-5.85) 11(0,-6.5) 12(0,-7.15) 13(0,-7.8) 14(0,-8.45) 15(0,-9.1) 16(0,-9.75) 17(0,-10.4) 18(0,-11.05) 19(0,-11.7) 20(0,-12.35) 21(0,-13) 22(0,-13.65) 23(0,-14.3) 24(0,-14.95) 25(0,-15.6) 26(0,-16.25) 27(0,-16.9) 28(0,-17.55) 29(0,-18.2) 30(0,-18.85) 31(0,-19.5) 32(0,-20.15) 33(0,-20.8) 34(0,-21.45) 35(0,-22.1) 36(0,-22.75) 37(0,-23.4) 38(0,-24.05) 39(0,-24.7) 40(0,-25.35) 81(32.95,-25.35) 82(32.95,-24.7) 83(32.95,-24.05) 84(32.95,-23.4) 85(32.95,-22.75) 86(32.95,-22.1) 87(32.95,-21.45) 88(32.95,-20.8) 89(32.95,-20.15) 90(32.95,-19.5) 91(32.95,-18.85) 92(32.95,-18.2) 93(32.95,-17.55) 94(32.95,-16.9) 95(32.95,-16.25) 96(32.95,-15.6) 97(32.95,-14.95) 98(32.95,-14.3) 99(32.95,-13.65) 100(32.95,-13) 101(32.95,-12.35) 102(32.95,-11.7) 103(32.95,-11.05) 104(32.95,-10.4) 105(32.95,-9.75) 106(32.95,-9.1) 107(32.95,-8.45) 108(32.95,-7.8) 109(32.95,-7.15) 110(32.95,-6.5) 111(32.95,-5.85) 112(32.95,-5.2) 113(32.95,-4.55) 114(32.95,-3.9) 115(32.95,-3.25) 116(32.95,-2.6) 117(32.95,-1.95) 118(32.95,-1.3) 119(32.95,-0.65) 120(32.95,0)
  rect 0.35x0.8 smd: 41(3.8,-29.15) 42(4.45,-29.15) 43(5.1,-29.15) 44(5.75,-29.15) 45(6.4,-29.15) 46(7.05,-29.15) 47(7.7,-29.15) 48(8.35,-29.15) 49(9,-29.15) 50(9.65,-29.15) 51(10.3,-29.15) 52(10.95,-29.15) 53(11.6,-29.15) 54(12.25,-29.15) 55(12.9,-29.15) 56(13.55,-29.15) 57(14.2,-29.15) 58(14.85,-29.15) 59(15.5,-29.15) 60(16.15,-29.15) 61(16.8,-29.15) 62(17.45,-29.15) 63(18.1,-29.15) 64(18.75,-29.15) 65(19.4,-29.15) 66(20.05,-29.15) 67(20.7,-29.15) 68(21.35,-29.15) 69(22,-29.15) 70(22.65,-29.15) 71(23.3,-29.15) 72(23.95,-29.15) 73(24.6,-29.15) 74(25.25,-29.15) 75(25.9,-29.15) 76(26.55,-29.15) 77(27.2,-29.15) 78(27.85,-29.15) 79(28.5,-29.15) 80(29.15,-29.15) 121(29.15,3.8) 122(28.5,3.8) 123(27.85,3.8) 124(27.2,3.8) 125(26.55,3.8) 126(25.9,3.8) 127(25.25,3.8) 128(24.6,3.8) 129(23.95,3.8) 130(23.3,3.8) 131(22.65,3.8) 132(22,3.8) 133(21.35,3.8) 134(20.7,3.8) 135(20.05,3.8) 136(19.4,3.8) 137(18.75,3.8) 138(18.1,3.8) 139(17.45,3.8) 140(16.8,3.8) 141(16.15,3.8) 142(15.5,3.8) 143(14.85,3.8) 144(14.2,3.8) 145(13.55,3.8) 146(12.9,3.8) 147(12.25,3.8) 148(11.6,3.8) 149(10.95,3.8) 150(10.3,3.8) 151(9.65,3.8) 152(9,3.8) 153(8.35,3.8) 154(7.7,3.8) 155(7.05,3.8) 156(6.4,3.8) 157(5.75,3.8) 158(5.1,3.8) 159(4.45,3.8) 160(3.8,3.8)
  silkscreen extent 0.93,-28.22 32.02,2.86
SIL151 [mm]
  rect 0.8x0.35 smd: 1(0,0) 2(0,0.65) 3(0,1.3) 4(0,1.95) 5(0,2.6) 6(0,3.25) 7(0,3.9) 8(0,4.55) 9(0,5.2) 10(0,5.85) 11(0,6.5) 12(0,7.15) 13(0,7.8) 14(0,8.45) 15(0,9.1) 16(0,9.75) 17(0,10.4) 18(0,11.05) 19(0,11.7) 20(0,12.35) 21(0,13) 22(0,13.65) 23(0,14.3) 24(0,14.95) 25(0,15.6) 51(-23.2,15.6) 52(-23.2,14.95) 53(-23.2,14.3) 54(-23.2,13.65) 55(-23.2,13) 56(-23.2,12.35) 57(-23.2,11.7) 58(-23.2,11.05) 59(-23.2,10.4) 60(-23.2,9.75) 61(-23.2,9.1) 62(-23.2,8.45) 63(-23.2,7.8) 64(-23.2,7.15) 65(-23.2,6.5) 66(-23.2,5.85) 67(-23.2,5.2) 68(-23.2,4.55) 69(-23.2,3.9) 70(-23.2,3.25) 71(-23.2,2.6) 72(-23.2,1.95) 73(-23.2,1.3) 74(-23.2,0.65) 75(-23.2,0)
  rect 0.35x0.8 smd: 26(-3.8,19.4) 27(-4.45,19.4) 28(-5.1,19.4) 29(-5.75,19.4) 30(-6.4,19.4) 31(-7.05,19.4) 32(-7.7,19.4) 33(-8.35,19.4) 34(-9,19.4) 35(-9.65,19.4) 36(-10.3,19.4) 37(-10.95,19.4) 38(-11.6,19.4) 39(-12.25,19.4) 40(-12.9,19.4) 41(-13.55,19.4) 42(-14.2,19.4) 43(-14.85,19.4) 44(-15.5,19.4) 45(-16.15,19.4) 46(-16.8,19.4) 47(-17.45,19.4) 48(-18.1,19.4) 49(-18.75,19.4) 50(-19.4,19.4) 76(-19.4,-3.8) 77(-18.75,-3.8) 78(-18.1,-3.8) 79(-17.45,-3.8) 80(-16.8,-3.8) 81(-16.15,-3.8) 82(-15.5,-3.8) 83(-14.85,-3.8) 84(-14.2,-3.8) 85(-13.55,-3.8) 86(-12.9,-3.8) 87(-12.25,-3.8) 88(-11.6,-3.8) 89(-10.95,-3.8) 90(-10.3,-3.8) 91(-9.65,-3.8) 92(-9,-3.8) 93(-8.35,-3.8) 94(-7.7,-3.8) 95(-7.05,-3.8) 96(-6.4,-3.8) 97(-5.75,-3.8) 98(-5.1,-3.8) 99(-4.45,-3.8) 100(-3.8,-3.8)
  silkscreen extent -22.27,-2.86 -0.94,18.47
SM0230 [mm]
  rect 0.8x0.35 smd: 1(0,0) 2(0,0.65) 3(0,1.3) 4(0,1.95) 5(0,2.6) 6(0,3.25) 7(0,3.9) 8(0,4.55) 9(0,5.2) 10(0,5.85) 21(-13.45,5.85) 22(-13.45,5.2) 23(-13.45,4.55) 24(-13.45,3.9) 25(-13.45,3.25) 26(-13.45,2.6) 27(-13.45,1.95) 28(-13.45,1.3) 29(-13.45,0.65) 30(-13.45,0)
  rect 0.35x0.8 smd: 11(-3.8,9.65) 12(-4.45,9.65) 13(-5.1,9.65) 14(-5.75,9.65) 15(-6.4,9.65) 16(-7.05,9.65) 17(-7.7,9.65) 18(-8.35,9.65) 19(-9,9.65) 20(-9.65,9.65) 31(-9.65,-3.8) 32(-9,-3.8) 33(-8.35,-3.8) 34(-7.7,-3.8) 35(-7.05,-3.8) 36(-6.4,-3.8) 37(-5.75,-3.8) 38(-5.1,-3.8) 39(-4.45,-3.8) 40(-3.8,-3.8)
  silkscreen extent -12.52,-2.86 -0.94,8.72
SN75LVDS83_v2 [mm]
  rect 1.2x1.2 hole 0.6: 1(0,0)
  round 1.2 hole 0.6: 2(0,-2.5) 3(0,-5) 4(0,-7.5) 5(0,-10) 6(0,-12.5) 7(0,-15) 8(0,-17.5) 9(0,-20) 10(0,-22.5) 11(0,-25) 12(0,-27.5) 13(0,-30) 14(0,-32.5) 15(0,-35) 16(0,-37.5) 17(0,-40) 18(0,-42.5) 19(0,-45) 20(0,-47.5) 21(0,-50) 22(0,-52.5) 23(0,-55) 24(0,-57.5) 25(0,-60) 26(0,-62.5) 27(0,-65) 28(0,-67.5) 29(15.2,-67.5) 30(15.2,-65) 31(15.2,-62.5) 32(15.2,-60) 33(15.2,-57.5) 34(15.2,-55) 35(15.2,-52.5) 36(15.2,-50) 37(15.2,-47.5) 38(15.2,-45) 39(15.2,-42.5) 40(15.2,-40) 41(15.2,-37.5) 42(15.2,-35) 43(15.2,-32.5) 44(15.2,-30) 45(15.2,-27.5) 46(15.2,-25) 47(15.2,-22.5) 48(15.2,-20) 49(15.2,-17.5) 50(15.2,-15) 51(15.2,-12.5) 52(15.2,-10) 53(15.2,-7.5) 54(15.2,-5) 55(15.2,-2.5) 56(15.2,0)
  silkscreen extent 2.08,-68.75 13.12,1.25
ST_80_2_ADI [mil]
  rect 57.56x16.97 smd paste+0 mask+0: 1(-304,243.11) 2(-304,217.52) 3(-304,191.93) 4(-304,166.34) 5(-304,140.75) 6(-304,115.16) 7(-304,89.57) 8(-304,63.98) 9(-304,38.38) 10(-304,12.79) 11(-304,-12.8) 12(-304,-38.39) 13(-304,-63.98) 14(-304,-89.57) 15(-304,-115.16) 16(-304,-140.75) 17(-304,-166.34) 18(-304,-191.93) 19(-304,-217.52) 20(-304,-243.11) 41(304,-243.11) 42(304,-217.52) 43(304,-191.93) 44(304,-166.34) 45(304,-140.75) 46(304,-115.16) 47(304,-89.57) 48(304,-63.98) 49(304,-38.39) 50(304,-12.8) 51(304,12.79) 52(304,38.38) 53(304,63.98) 54(304,89.57) 55(304,115.16) 56(304,140.75) 57(304,166.34) 58(304,191.93) 59(304,217.52) 60(304,243.11)
  rect 16.97x57.56 smd paste+0 mask+0: 21(-243.11,-304) 22(-217.52,-304) 23(-191.93,-304) 24(-166.34,-304) 25(-140.75,-304) 26(-115.16,-304) 27(-89.57,-304) 28(-63.98,-304) 29(-38.39,-304) 30(-12.8,-304) 31(12.8,-304) 32(38.39,-304) 33(63.98,-304) 34(89.57,-304) 35(115.16,-304) 36(140.75,-304) 37(166.34,-304) 38(191.93,-304) 39(217.52,-304) 40(243.11,-304) 61(243.11,304) 62(217.52,304) 63(191.93,304) 64(166.34,304) 65(140.75,304) 66(115.16,304) 67(89.57,304) 68(63.98,304) 69(38.39,304) 70(12.8,304) 71(-12.8,304) 72(-38.39,304) 73(-63.98,304) 74(-89.57,304) 75(-115.16,304) 76(-140.75,304) 77(-166.34,304) 78(-191.93,304) 79(-217.52,304) 80(-243.11,304)
  silkscreen extent -353,-353 353,353
VGA [mm]
  round 1.22 hole 0.61: 1(-5,2) 2(-3,2) 3(-1,2) 4(1,2) 5(3,2) 6(-4,0) 7(-2,0) 8(0,0) 9(2,0) 10(4,0) 11(-5,-2) 12(-3,-2) 13(-1,-2) 14(1,-2) 15(3,-2)
  round 2.5 hole 1.25: 16(8,0) 17(-9,0)
  silkscreen extent -11,-7 10,4
zener_diode [mm]
  rect 0.25x0.55 smd: 1(-1.6,0) 2(1.5,0)
  silkscreen extent -2,-0.9 1.9,0.9

## Part data
C1 C2 C3 C4 C5 C7 C8 C9 C10 C11 C12 C13 C15 C16 C17 C18 C19 C20 C21 C22 C23 C24 C25 C26 C27 C28 C29 C30 C31 C32 C33 C34 C36 C37 C38 C39 C44 C45 C46 C47 C48 C49 C50 C51 C53 C54 C55 C56 C58 C59 C60 C61 C62 C63 C65 C66 C67 C68 C69 C70 C71 C72 C73 C74 C75 C76 C77 C78 C79 C80 C81 C82 C83 C84 C85 C86 C87 C88 C89 C90 C91 C92 C93 C94 C95 C96 C97 C98 C99 C100 C101 C102 C103 C104 C105 C106 C107 C108 C109 C110 C111 C112 C113 C114 C115 C116 C117 C118 C119 C120 C121 C122 C123 C124 C125 C126 C127 C128 C129 C130 C131 C132 C133 C138 C139 C140 C141 C142 C143 C144 C145 C146 C147 C148 C149 C150 C151 C152 C153 C154 C155 C156 C157 C158 C159 C160 C161 C162 C164 C165 C166 C167 C168 C169 C170 C171 C172: library part Capacitor
C6 C14 C35 C40 C41 C42 C43 C52 C57 C64 C134 C135 C136 C137 C163: library part TuningCapacitor
D4 D5 D6 D7 D8: library part Diode
L1 L2 L3 L4 L5 L6 L7 L8 L9 L10 L11 L12 L13 L14 L15 L16 L17 L18 L19 L20 L21 L22 L23 L24: library part Inductor
R1 R2 R3 R4 R5 R6 R7 R8 R9 R10 R11 R12 R13 R14 R15 R16 R17 R18 R19 R20 R21 R22 R23 R24 R25 R26 R27 R28 R29 R30 R31 R32 R33 R34 R35 R36 R37 R38 R39 R40 R41 R42 R43 R44 R45 R46 R47 R48 R49 R50 R51 R52 R53 R54 R55 R56 R57 R58 R59 R60 R61 R62 R63 R64 R65 R66 R67 R68 R69 R70 R71 R72 R73 R74 R75 R76 R77 R78 R79 R80 R81 R82 R83 R84 R85 R86 R87 R88 R89 R90 R91 R92 R93 R94 R95 R96 R97 R98 R99 R100 R101 R102 R103 R104 R105 R106 R107 R108 R109 R110 R111 R112 R113 R114 R115 R116 R117 R118 R119 R120 R121 R122 R123 R124 R125 R126 R127 R128 R129 R130 R131 R132 R133 R134 R135 R136 R137 R138 R139 R140 R141 R142 R143 R144 R145 R146 R147 R148 R149 R150 R151 R152 R153 R154 R155 R156 R157 R158 R159 R160 R161 R162 R163 R164 R165 R166 R167 R168 R169 R170 R171 R172 R173 R174 R175 R176 R177 R178 R179 R180 R181 R182 R183 R184 R185 R186 R187 R188 R189 R190 R191 R192 R193 R194 R195 R196 R197 R198 R199 R200 R201 R202 R203 R204 R205 R206 R207 R208 R209 R210 R211 R212 R213 R214 R215 R216 R217 R218 R219 R220 R221 R222 R223 R224 R225 R226 R227 R228 R229 R230 R231 R232 R233 R234 R235 R236 R237 R238 R239: library part Resistor
RX_CLK RX_CLK+ RX_D0+ RX_D0- RX_D1+ RX_D1- RX_D2+ RX_D2-: library part InputArrow
U1: library part 74LVX14
U7: library part SIL151
U10: library part 74AHC1G14-TA
W1: library part VGA_connector
ZD1 ZD2 ZD3 ZD4 ZD5 ZD6 ZD7 ZD8 ZD9: library part DiodeSchottky
ZQ1: library part Crystal
U4: Built_By=EMA_UL_Team, Copyright="Copyright (C) 2018 Accelerated Designs. All rights reserved", Manufacturer_Part_Number=AD9883ABSTZ-140, RefDes=RefDes, SourceLibrary=Analog_2012-01-01_6, Type=DEV, Vendor="Analog Devices Inc"

## Free pads (board coordinates)
  round 1.524 hole 2 unplated: 1(175,820) 1(175,1055) 1(515,820) 1(515,1055)

## Via types
v1: diameter 0.6, hole 0.3, Top Layer to Bottom Layer, 699 vias

## Nets (pads, with @x,y where several pads share a name; then routed paths per layer and width w, separated by ;. In a path a pad name is that pad's centre, name@x,y a point inside that pad or via, vN(x,y) a via of type N, cw(c..) or ccw(c..) an arc to the next point about the centre after c; other vN are vias at no path point)
3_3Va: L13.1 L14.1 L15.1 L18.1 | length 83.3
  Top Layer w0.25: L15.1@210,860 L15.1@209.953,859.953 ; L14.1@210.5,824.5 207.772,824.5 207.416,824.856 207.416,845 L13.1@210,845 207.416,847.584 207.416,857.416 L15.1@209.953,859.953 ; L18.1@225,870 222.403,870 222.403,877.112 220.624,878.891 212.852,878.891 209.906,875.944 209.906,860 L15.1@209.953,859.953
3V3: C62.2 C171.1 L1.2 L7.2 L12.2 R110.1 R111.1 R181.2 R182.2 R187.2 R188.2 R202.2 R203.2 R210.1 R211.1 R212.1 R213.1 R214.1 R215.1 R216.1 R217.1 R219.1 R220.1 R221.1 R222.1 R223.1 R224.1 R225.1 R226.2 R227.1 R228.1 R229.1 R230.1 R238.2 R239.2 U1.14 U8.8 U15.14 U17.2 U17.8 VT2.2 VT4.2 | length 849.4
  Top Layer w0.25: U1.14@193.7,957.04 192.532,957.04 191.948,956.456 191.948,931.342 192.405,930.885 197.612,930.885 198.044,930.453 198.044,927.075 196.367,925.398 196.367,916.965 199,914.333 L1.2@199,909.5 L7.2@199,899.5 L12.2@199,889.5 199,875.191 200.152,874.039 v1(203.403,874.039) ; U15.14@285,854.81 v1(286.388,854.81) ; R227.1@290,865 R228.1@297.5,865 ; U17.8@297.5,856.04 R228.1@297.5,865 ; R229.1@305,865 306.019,865 308.381,862.638 ; VT2.2@306.4,838.5 307.5,839.6 C171.1@307.5,849.5 308.381,850.381 308.381,862.638 ; v1(315.5,830.478) R239.2@315.5,833.476 ; R239.2@315.5,833.5 R239.2@315.5,833.476 ; C62.2@325.95,970.85 326.95,969.85 R110.1@330.95,969.85 ; R111.1@330.95,974.85 R110.1@330.95,969.85 ; v1(351.892,852.983) 351.9,852.991 R226.2@351.9,854.2 ; R181.2@366.9,866.7 R182.2@366.9,874.2 R187.2@366.9,881.7 ; R188.2@366.9,889.2 R187.2@366.9,881.7 ; R202.2@373.9,876.7 R202.2@373.9,876.706 ; R216.1@404.4,843.7 R214.1@396.9,843.7 398.043,842.557 398.043,837.343 R223.1@396.9,836.2 ; R224.1@426.4,849.2 R222.1@426.4,856.7 426.4,861.761 ; R217.1@426.4,871.7 426.4,870.712 426.984,870.128 429.641,870.128 430.225,870.712 ; R210.1@426.4,894.2 426.4,890.694 426.9,890.194 R213.1@426.9,886.7 426.9,883.175 426.4,882.675 R215.1@426.4,879.2 426.4,876.61 430.225,872.785 430.225,870.712 ; R228.1@297.5,865 300.736,865 301.997,866.261 301.997,870.525 303.225,871.753 312.598,871.753 318.351,866 332.372,866 ; 308.381,862.638 308.381,863.6 309.781,865 R230.1@312.5,865 336.5,865 VT4.2@337.5,866 332.372,866 ; R239.2@315.5,833.476 384.307,833.476 387.032,836.2 R221.1@389.4,836.2 ; R110.1@330.95,969.85 330.95,967.348 330.91,967.308 U8.8@330.91,964.85 330.91,961.465 330,960.555 R238.2@330,874 329.184,874 328.092,872.908 328.092,870.28 332.372,866 ; R187.2@366.9,881.7 369.4,884.2 R203.2@373.9,884.2 373.9,883.532 374.542,882.891 374.542,881.514 373.9,880.872 R202.2@373.9,876.706 ; R202.2@373.9,876.706 372.872,876.706 372.085,875.919 372.085,873.789 372.175,873.698 372.175,866.125 375.234,863.067 375.234,860.196 378.231,857.199 378.231,852.504 373.275,847.547 373.275,845.875 378.888,845.875 380.238,844.525 380.238,836.717 380.755,836.2 R219.1@381.9,836.2 383.032,837.332 383.032,842.568 R211.1@381.9,843.7 R212.1@389.4,843.7 389.4,842.043 390.55,840.892 390.55,837.35 R221.1@389.4,836.2 ; R221.1@389.4,836.2 R223.1@396.9,836.2 ; R223.1@396.9,836.2 R225.1@404.4,836.2 418.599,836.2 430.225,847.827 430.225,857.936 426.4,861.761 ; 426.4,861.761 R220.1@426.4,864.2 426.4,866.303 430.225,870.128 430.225,870.712
  Bottom Layer w0.25: v1(203.403,874.039) 219.634,857.809 283.389,857.809 ; v1(286.388,854.81) 283.389,857.809 ; 286.434,856.996 289.382,856.996 ; U17.2@289.88,853.5 289.128,854.252 ; U17.8@297.5,856.04 296.544,856.996 ; VT2.2@306.4,838.5 314.422,830.478 v1(315.5,830.478) ; C171.1@307.5,849.5 310.983,852.983 v1(351.892,852.983) ; 283.389,857.809 285.571,857.809 ; 285.571,857.809 289.128,854.252 ; 285.571,857.809 295.731,857.809 296.544,856.996 ; 289.128,854.252 289.128,856.742 289.382,856.996 ; 289.382,856.996 296.544,856.996
3V3b: C134.1 L19.1 L21.1 L22.1 L23.1 | length 236.6
  Top Layer w0.25: L19.1@310,942.5 v1(313.512,942.5) ; v1(421.767,916.127) 449.097,888.797 449.097,853.846 451.587,851.357 451.587,846.404 449.021,843.839 L21.1@449.021,842 ; L21.1@449,842 L21.1@449.021,842 ; L23.1@475,842 471.246,842 L22.1@467.5,842 462.729,842 462.229,842.5 C134.1@457.5,842.5 453.484,842.5 452.984,842 L21.1@449.021,842
  Bottom Layer w0.25: v1(313.512,942.5) 314.841,941.172 378.333,941.172 403.377,916.127 v1(421.767,916.127)
3V3LVDSA: C136.1 C139.2 C142.2 C145.2 C148.2 L22.2 U13.44 U14.44 | length 261.2
  Top Layer w0.25: C148.2@454.5,885 454.5,881.228 454.573,881.155 454.573,878.898 454.5,878.825 C145.2@454.5,877.5 C142.2@454.5,870 C139.2@454.5,862.5 452.587,864.413 451.104,864.413 449.605,862.914 449.605,854.456 450.19,853.872 v1(456,853.872) C136.1@456,855.5 ; v1(461.872,848) L22.2@467.5,848 ; v1(498.094,1000.836) 501.066,997.864 501.066,904.134 U13.44@502.7,902.5
  Bottom Layer w0.25: C148.2@454.5,885 455.58,883.92 469.798,883.92 ; v1(456,853.872) v1(461.872,848) ; v1(498.094,1000.836) 499.758,1002.5 U14.44@502.7,1002.5 ; U13.44@502.7,902.5 504.183,901.017 504.183,895.089 503.098,894.004 498.958,894.004 ; 469.798,883.92 488.874,883.92 498.958,894.004 ; 469.798,883.92 474.878,889 488.467,889 493.471,894.004 498.958,894.004
3V3LVDSD: C135.1 C138.2 C141.2 C144.2 C147.2 C150.2 C151.2 C152.2 C153.2 C154.2 C155.2 C156.2 C157.2 L21.2 R177.2 R179.2 U13.1 U13.9 U13.26 U14.1 U14.9 U14.26 | length 374.2
  Top Layer w0.25: C147.2@447.5,885 C144.2@447.5,877.5 C141.2@447.5,870 C138.2@447.5,862.5 446.5,861.5 C135.1@446.5,855.5 446.5,850.5 L21.2@449,848 ; C150.2@462.5,895 C151.2@462.5,902.5 C152.2@462.5,910 C153.2@462.5,917.5 C154.2@462.5,925 C155.2@462.5,932.5 C156.2@462.5,940 C157.2@462.5,947.5 ; R179.2@462.5,1037.5 462.5,1036.278 v1(462.509,1036.269) ; v1(480.492,1036.269) 480.5,1036.277 R177.2@480.5,1037.5 v1(480.5,1040.663) ; U13.26@487.5,870 486.512,869.012 486.512,864.108 487.147,863.473 488.442,863.473 489.509,864.54 489.509,910.491 U13.9@487.5,912.5 486.512,913.488 486.512,931.512 U13.1@487.5,932.5 486.512,933.488 486.512,969.012 U14.26@487.5,970 486.004,971.496 486.004,1011.004 U14.9@487.5,1012.5 488.493,1013.493 488.493,1031.507 U14.1@487.5,1032.5
  Bottom Layer w0.25: C141.2@447.5,870 448.668,868.832 486.332,868.832 U13.26@487.5,870 ; C155.2@462.5,932.5 463.404,931.596 476.072,931.596 476.976,932.5 U13.1@487.5,932.5 ; v1(462.509,1036.269) 466.903,1040.663 v1(480.5,1040.663) ; v1(480.492,1036.269) 484.261,1032.5 U14.1@487.5,1032.5
3V3LVDSP: C137.1 C140.2 C143.2 C146.2 C149.2 L23.2 U13.34 U14.34 | length 206.1
  Top Layer w0.25: C149.2@462,885 C146.2@462,877.5 C143.2@462,870 C140.2@462,862.5 465.98,858.52 470.967,858.52 471.983,857.504 ; C137.1@466,855.5 466,854.329 467.081,854.329 467.538,853.872 471.983,853.872 471.983,857.504 ; L23.2@475,848 472.694,848 472.343,848.351 472.343,857.144 471.983,857.504 ; U13.34@502.7,877.5 504.19,878.99 504.19,895.248 502.92,896.518 502.077,896.518 501.721,896.874 501.721,898.063 502.666,899.008 503.428,899.008 504.698,900.278 504.698,904.977 504.19,905.485 504.19,976.01 U14.34@502.7,977.5
  Bottom Layer w0.25: C146.2@462,877.5 464.521,874.979 483.108,874.979 486.867,878.738 501.462,878.738 U13.34@502.7,877.5